# Altium PCB HVBoard_PCB.PcbDoc (part 1 of 2)
Units mm, origin at the board's own origin, x right, y up, seen from the top; angles counter-clockwise.
Board outline 140 x 60 mm, 2 copper layers (Top Layer, Bottom Layer); 89 components, 40 nets, 274 pads, 535 vias.
Unrouted connection lines stored in the file: 6.
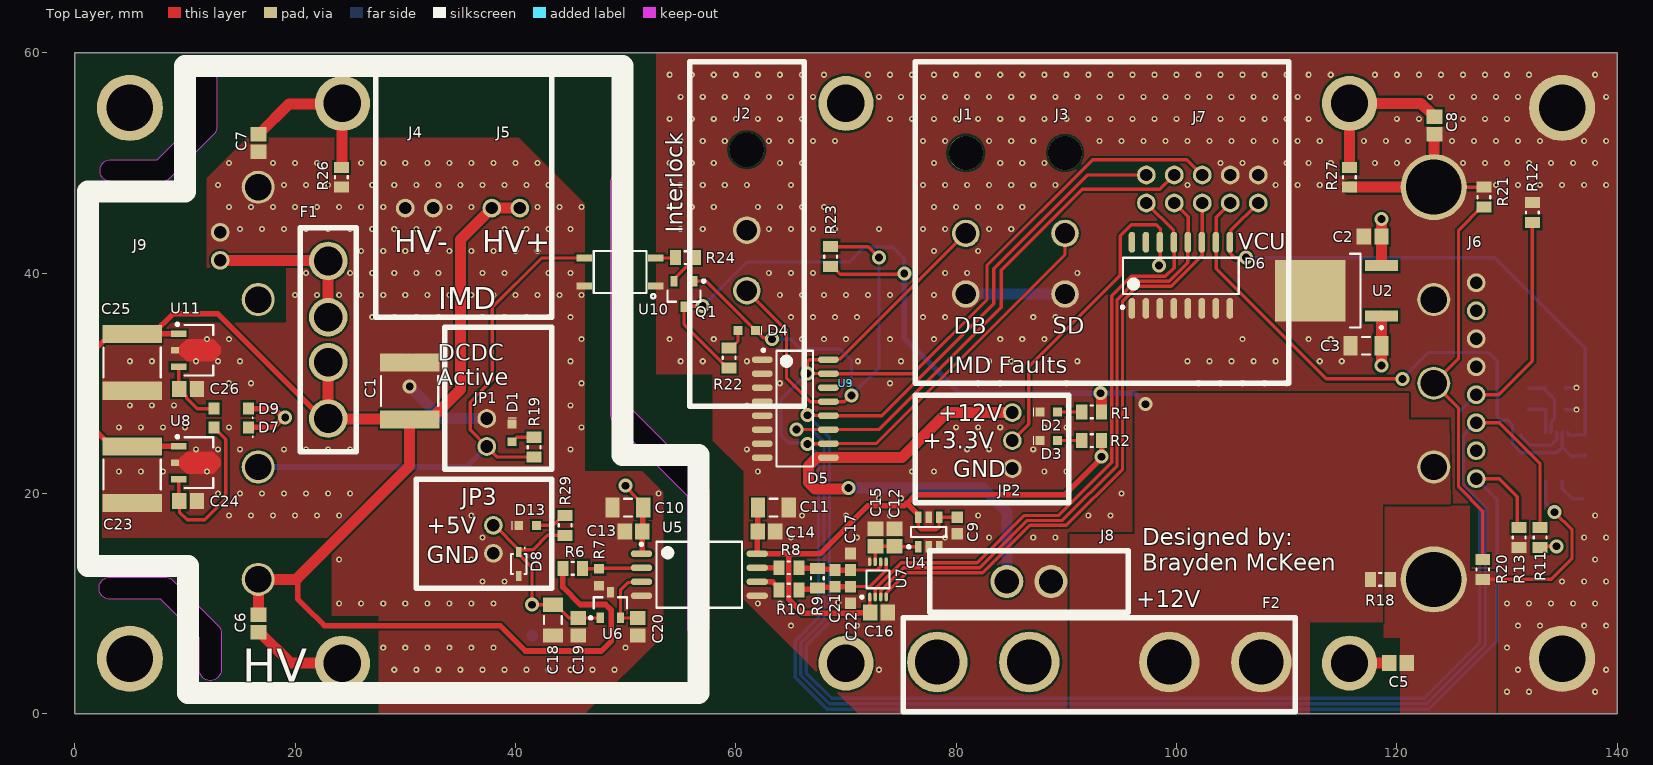
[diagram p0: Top Layer view]
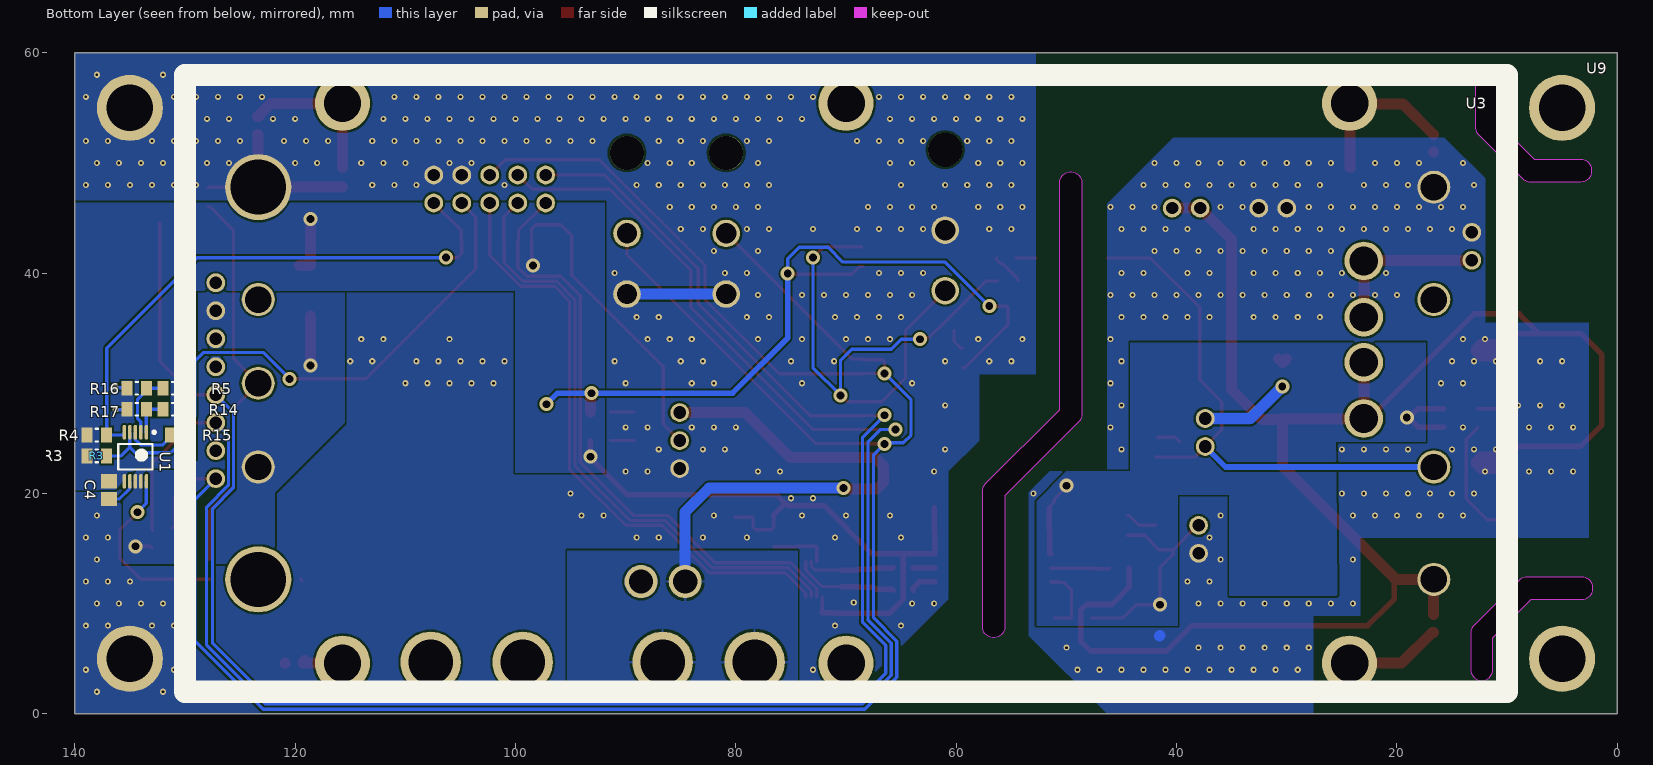
[diagram p1: Bottom Layer view, seen from below]
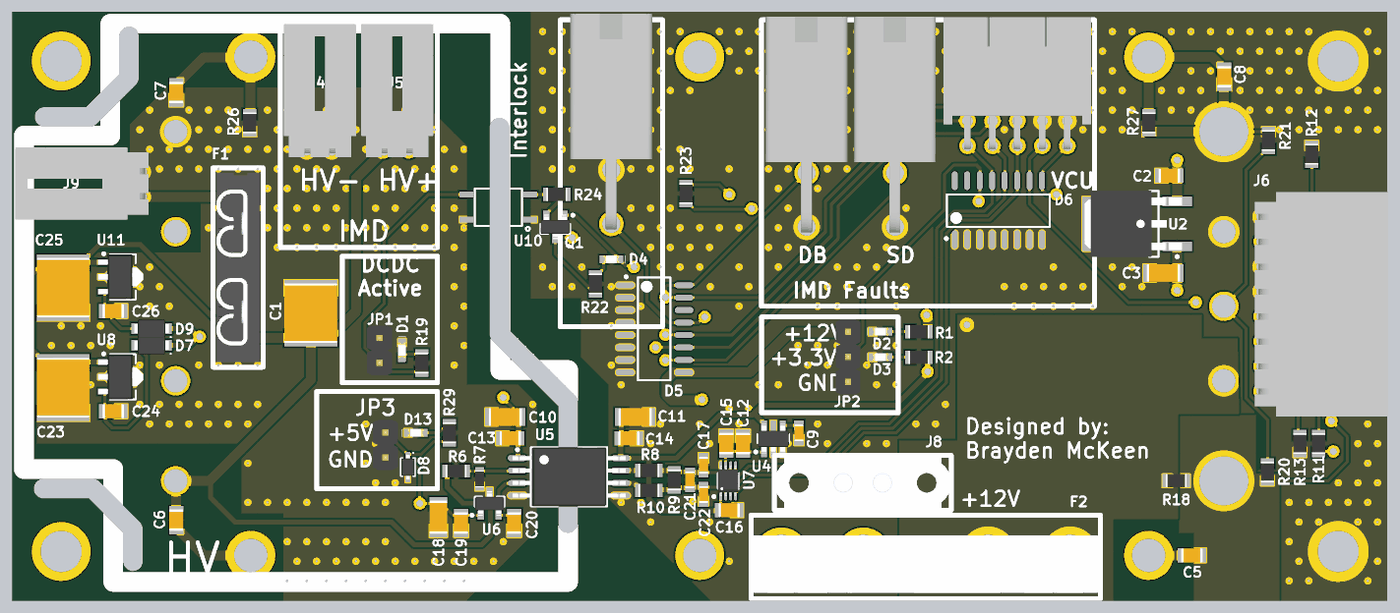
[diagram p2: 3D render of the assembled board from above, using the file's embedded part models]
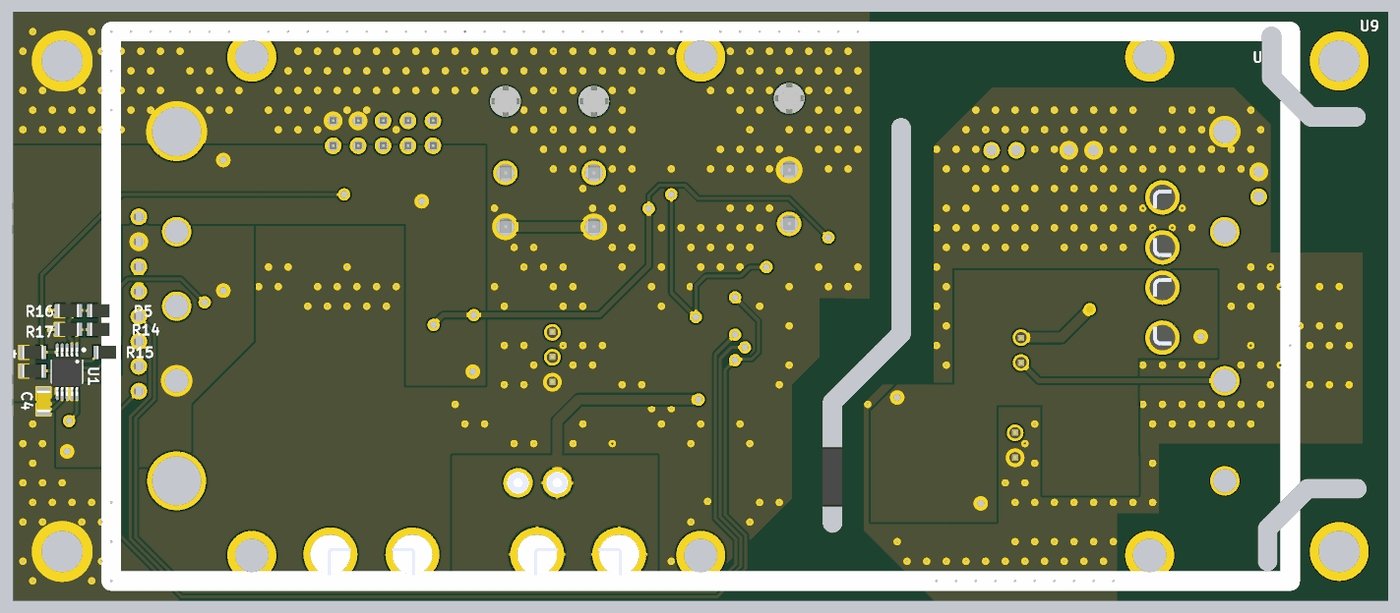
[diagram p3: 3D render of the assembled board from below, using the file's embedded part models]

## Layer stack, top to bottom
Top Solder: solder mask 0.0102, Solder Resist, Dk 3.5
Top Layer: signal copper 0.0356
Dielectric 1: dielectric 0.32, FR-4, Dk 4.8
Bottom Layer: signal copper 0.0356
Bottom Solder: solder mask 0.0102, Solder Resist, Dk 3.5

## Board outline
0,0 0,60 140,60 140,0
cut-out: 3.2,10.4 cw(c3.2,11.4) 3.2,12.4 8.2,12.4 cw(c8.2,11.4) 8.907,12.107 13.007,8.007 cw(c12.3,7.3) 13.3,7.3 13.3,4 cw(c12.3,4) 11.3,4 11.3,6.886 7.786,10.4
cut-out: 3.3,48.3 cw(c3.3,49.3) 3.3,50.3 7.486,50.3 10.9,53.714 10.9,57.5 cw(c11.9,57.5) 12.9,57.5 12.9,53.3 cw(c11.9,53.3) 12.607,52.593 8.607,48.593 cw(c7.9,49.3) 7.9,48.3
cut-out: 48.893,26.493 55.6,19.786 55.6,7.9 ccw(c56.6,7.9) 57.6,7.9 57.6,20.2 ccw(c56.6,20.2) 57.307,20.907 50.6,27.614 50.6,48.2 ccw(c49.6,48.2) 48.6,48.2 48.6,27.2 ccw(c49.6,27.2)

## Design rules (kind name [scope] priority, off if disabled: settings)
Clearance Isolation [InNet('GND-HV') vs InNet('GND-LV')] p1: gap=0.15 ignorepadtopadclearanceinfootprint=FALSE except(6.4: Fill-Fill Fill-Poly Fill-Region Poly-Poly Poly-Region Region-Region)
Clearance Clearance_HV [InNetClass('HV')] p2: gap=0.3 ignorepadtopadclearanceinfootprint=FALSE
Clearance [All] p3: gap=0.15 ignorepadtopadclearanceinfootprint=FALSE except(0.2: Arc-Fill Arc-Poly Arc-Region Track-Fill Track-Poly Track-Region SMDPad-Fill SMDPad-Poly SMDPad-Region THPad-Fill THPad-Poly THPad-Region Via-Fill Via-Poly Via-Region Fill-Fill Fill-Poly Fill-Region Poly-Poly Poly-Region Region-Region)
ComponentClearance [All] p1 off: gap=0.254 collisioncheckmode=3 verticalgap=0 showdistances=FALSE
HoleSize [All] p1: absolutevalues=TRUE maxlimit=100 minlimit=0.025 maxpercent=80.000 minpercent=20.000
MinimumSolderMaskSliver [All] p1: minsoldermaskwidth=0.2
PolygonConnect PolygonConnect_1 [InNet('+12') or InNet('NetC5_2') or InNet('GND-LV') or InNet('GND-HV') or InNet('+3.3-LV') or InNet('+5-HV') or InNet('NetD5_12')] p1: connectstyle=Direct reliefconductorwidth=0.254 reliefentries=4 polygonreliefangle="90 Angle" airgapwidth=0.254
PolygonConnect [All] p2: connectstyle=Relief reliefconductorwidth=0.254 reliefentries=4 polygonreliefangle="90 Angle" airgapwidth=0.254
RoomDefinition HVPowerSupply [InComponentClass('HVPowerSupply')] p1 off: confinementstyle=ConfineIn formatcopy=TRUE lockcomponents=FALSE outline 141.224,28.448 240.157,28.448 240.157,43.434 141.224,43.434
RoomDefinition ConnectorsAndProtection [InComponentClass('ConnectorsAndProtection')] p2 off: confinementstyle=ConfineIn formatcopy=TRUE lockcomponents=FALSE outline 141.097,1.524 231.902,1.524 231.902,27.178 141.097,27.178
RoomDefinition IMD [InComponentClass('IMD')] p3 off: confinementstyle=ConfineIn formatcopy=TRUE lockcomponents=FALSE outline 88.265,1.524 161.163,1.524 161.163,144.653 88.265,144.653
RoomDefinition VoltageMeasurement [InComponentClass('VoltageMeasurement')] p4 off: confinementstyle=ConfineIn formatcopy=TRUE lockcomponents=FALSE outline 0,0 50.8,0 50.8,25.4 0,25.4
RoomDefinition IsoPowerSupply [InComponentClass('IsoPowerSupply')] p5 off: confinementstyle=ConfineIn formatcopy=TRUE lockcomponents=FALSE outline 88.392,1.524 93.345,1.524 93.345,17.145 88.392,17.145
RoutingVias [All] p1: holewidth=0.711 width=1.27 viastyle="Through Hole" minholewidth=0.711 minwidth=1.27 maxholewidth=0.711 maxwidth=1.27
SilkToSolderMaskClearance [IsPad] p1: minsilkscreentomaskgap=0.15 clearancetoexposedcopper=TRUE
SolderMaskExpansion [All] p1: expansion=0.102 istentingtop=FALSE
Width [All] p1: maxlimit=5 minlimit=0.2 preferedwidth=0.2 minimp=50.000000 maximp=50.000000 favimp=50.000000
26 further rules are at their usual default settings.

## Classes and differential pairs
component class HVPowerSupply: C23 C24 C25 C26 D7 D9 D13 R29 U8 U11
component class ConnectorsAndProtection: D4 D5 D6 D8 F1 F2 J1 J2 J3 J7 J8 J9 JP2 JP3 R22 R23 X1 X2
component class IMD: J4 J5 J6 R11 R12 R13 U9
component class VoltageMeasurement: C9 C10 C11 C12 C13 C14 C15 C16 C17 C18 C19 C20 C21 C22 R6 R7 R8 R9 R10 U4 U5 U6 U7
component class IsoPowerSupply: C1 C2 C3 C4 C5 C6 C7 C8 D1 D2 D3 JP1 Q1 R1 R2 R3 R4 R5 R14 R15 R16 R17 R18 R19 R20 R21 R24 R26 R27 U1 U2 U3 u10

## Components (designator, comment, footprint, x,y, rotation, side; value= is the part's Value field where it differs from the comment)
C1 "2.2uF" CAP-2220 30.4,29.3 r270 top
C2 "4.7uF" CAP-0805 117.8,43.3 r0 top
C3 "10uF" CAP-1206 117.2,33.4 r0 top
C4 "0.1uF" CAP-0805 136.9,20.3 r270 bottom
C5 "4.7nF" CAP-0805 120.1,4.6 r0 top
C6 "4.7nF" CAP-0805 16.7,8.2 r90 top
C7 "4.7nF" CAP-0805 16.7,51.8 r270 top
C8 "4.7nF" CAP-0805 123.4,53.4 r270 top
C9 "2.2uF" CAP-0603 80.1,17.1 r90 top
C10 "10uF" CAP-1206 50.212,18.713 r0 top
C11 "10uF" CAP-1206 63.42,18.713 r0 top
C12 "390pF" CAP-0805 74.4,16 r270 top
C13 "0.1uF" CAP-0805 50.72,16.554 r0 top
C14 "0.1uF" CAP-0805 62.785,16.554 r0 top
C15 "1uF" CAP-0805 72.7,16 r90 top
C16 "1uF" CAP-0805 73,9.2 r180 top
C17 "1nF" CAP-0603 70.4,13.8 r90 top
C18 "10uF" CAP-1206 43.4,8.5 r90 top
C19 "0.1uF" CAP-0805 45.7,7.9 r90 top
C20 "0.1uF" CAP-0805 51.1,7.9 r90 top
C21 "2.2nF" CAP-0603 69,12.3 r90 top
C22 "1nF" CAP-0603 70.4,10.8 r90 top
C23 "2.2uF" CAP-2220 5.2,21.7 r90 top
C24 "22uF" CAP-0805 10.3,19.3 r180 top
C25 "2.2uF" CAP-2220 5.2,31.9 r90 top
C26 "22uF" CAP-0805 10.3,29.5 r180 top
D1 "Green" LED-0603 38.9,26.7 r270 top
D2 "Green" LED-0603 87.2,26.6 r0 top
D3 "Green" LED-0603 87.2,24 r0 top
D4 "Green" LED-0603 62.2,35.6 r180 top
D5 "12V" 16-SO 65.4,27.7 r0 top
D6 "3.3V" 16-SO 100.4,39.8 r90 top
D7 "60V" Diode-SOD123W 14.2,26 r180 top
D8 "5V" DIODE-SOD323 40.3,13.6 r270 top
D9 "60V" Diode-SOD123W 14.2,27.7 r180 top
D13 "Green" LED-0603 39.9,16.3 r0 top
F1 "36-3522-2-ND" "Fuse Holder - 500V - 20A" 23,33.95 r270 top
F2 "36-3555-2-ND" "Fuse Holder - 500V - 50A" 93,4.7 r0 top
J1 "0768250002" 2X1PIN 80.88,38.1 r180 top
J2 "0768250002" 2X1PIN 61,38.4 r180 top
J3 "0768250002" 2X1PIN 89.88,38.1 r180 top
J4 "WM4153-ND" 2PIN 32.54,45.9 r180 top
J5 "WM4153-ND" 2PIN 40.4,45.9 r180 top
J6 "23-0705530112-ND" 8PIN 127.2,21.34 r90 top locked
J7 "WM8263-ND" 2X5PIN 107.42,48.9 r180 top
J8 "952-2900-ND" 2Pin-POWER 86.6,12 r0 top
J9 "WM4153-ND" 2PIN 13.2,43.7 r270 top
JP1 "732-5315-ND" 2PIN-JP 37.4,26.8 r270 top
JP2 "732-5316-ND" 3PIN-JP 85.1,27.34 r270 top
JP3 "732-5315-ND" 2PIN-JP 38,14.56 r90 top
Q1 "448-ISS17EP06LMXTSA1CT-ND" SOT-23-3 55.3,38.1 r270 top
R1 "2.2K" RES-0805 92.3,27.4 r0 top
R2 "280R" RES-0805 92.3,24.8 r0 top
R3 "10K" RES-0805 138,23.4 r0 bottom
R4 "10K" RES-0805 138,25.3 r0 bottom
R5 "DNP" RES-0805 131.072,29.55 r180 bottom
R6 "475KR" RES-0805 45.2,13.2 r0 top
R7 "5K" RES-0603 47.6,12.4 r90 top
R8 "30" RES-0805 64.817,13.252 r0 top
R9 "DNP" RES-0805 67.4,12.3 r90 top
R10 "30" RES-0805 64.817,11.22 r0 top
R11 "2.2K" RES-0805 133,16 r270 top
R12 "2.2K" RES-0805 132.3,45.5 r270 top
R13 "2.2K" RES-0805 131.1,16 r90 top
R14 "DNP" RES-0805 131.083,27.645 r180 bottom
R15 "10K" RES-0805 130.4,25.3 r180 bottom
R16 "DNP" RES-0805 134.374,29.55 r180 bottom
R17 "DNP" RES-0805 134.374,27.645 r180 bottom
R18 "738-CSSH0805FTL500CT-ND" RES-0805 118.5,12.2 r180 top
R19 "3.3K" RES-0805 41.7,24.2 r270 top
R20 "DNP" RES-0805 127.8,13.1 r270 top
R21 "DNP" RES-0805 127.9,46.9 r90 top
R22 "2.2K" RES-0805 59.4,32.3 r90 top
R23 "100K" RES-0805 68.6,41.5 r90 top
R24 "1K" RES-0805 55.442,41.4 r0 top
R26 "10M" RES-0805 24.2,48.7 r90 top
R27 "10M" RES-0805 115.7,48.7 r270 top
R29 "665R" RES-0805 44.5,17.1 r270 top
U1 "296-29034-1-ND" 10MSOP 134.501,23.327 r270 bottom
U2 "NCV5501DT33RKGOSCT-ND" DPAK-TO252 114.5,38.4 r180 top
U3 "V150A12C500BL" DCDC-200V-12V-500W 70,30 r0 top locked
U4 "MCP1501T-20E/CHYCT-ND" SOT-23-6 77.5,16.5 r90 top
U5 "296-44577-1-ND" 8-SOICW 56.689,12.617 r0 top
U6 "ISL21010CFH315Z-TKCT-ND" SOT-23-3 48.615,9.875 r90 top
U7 "296-39578-1-ND" 8VSSOP 72.9,12.2 r90 top
U8 "NCP785AH50T1GOSCT-ND" SOT-89 11,22.8 r0 top
U9 "ir155-3402" "IMD-Bender ir155 3204" 70,30 r180 top locked
U10 "TLP184(V4GBTRSE-ND" Photocoupler 49.5,40.1 r180 top
U11 "NCP785AH50T1GOSCT-ND" SOT-89 11,33 r0 top

## Footprints (in the part's own frame and the unit in brackets; to place one, negate y for a bottom-side part, rotate by r counter-clockwise, add the part's x,y. Pads: shape width x height; smd on the part's side, far side on the other; paste and mask are expansions set on the pad)
2PIN [mm]
  round 1.7 hole 1.11: 1(0,0) 2(2.54,0)
  body extent -2.48,-12.89 4.88,0.7, height 7.06
2PIN-JP [mm]
  round 1.7 hole 1.15: 1(0,0) 2(2.54,0)
  body extent -1.24,-1.27 3.84,1.27, height 8.57
2Pin-POWER [mm]
  round 3 hole 2.2: 1(-2,0) 2(2,0)
  silkscreen extent -9,-2.8 9,2.8, body extent -9,-3.27 9,2.78, height 5.6
2X1PIN [mm]
  round 2.5 hole 1.85: 1(0,0) 2(0,-5.5)
  round 3.1 hole 3.1: 3(0,-12.8)
  body extent -4.15,-21.4 4.2,0.56, height 14.55
2X5PIN [mm]
  round 1.7 hole 1.11: 1(0,0) 2(2.54,0) 3(5.08,0) 4(7.62,0) 5(10.16,0) 6(10.16,2.54) 7(7.62,2.54) 8(5.08,2.54) 9(2.54,2.54) 10(0,2.54)
  body extent -2.42,-10.55 12.62,2.85, height 9.87
3PIN-JP [mm]
  round 1.7 hole 1.15: 1(0,0) 2(2.54,0) 3(5.08,0)
  body extent -1.31,-1.27 6.31,1.27, height 8.57
8-SOICW [mm] "SOIC, 8-Leads, Body 5.85x7.50mm, Pitch 1.27mm, IPC Medium Density"
  oval 1.95x0.6 smd: 1(-5.25,1.905) 2(-5.25,0.635) 3(-5.25,-0.635) 4(-5.25,-1.905) 5(5.25,-1.905) 6(5.25,-0.635) 7(5.25,0.635) 8(5.25,1.905)
  silkscreen extent -5.37,-3 3.88,3, body extent -5.75,-3 5.75,3, height 2.8
8PIN [mm]
  round 1.7 hole 1.11: 1(0,0) 2(2.54,0) 3(5.08,0) 4(7.62,0) 5(10.16,0) 6(12.7,0) 7(15.24,0) 8(17.78,0)
  body extent -2.56,-12.89 20.3,0.7, height 7.06
8VSSOP [mm] "TSSOP, 8-Leads, Body 2.00x2.30mm, Pitch 0.50mm, IPC Medium Density"
  oval 0.8x0.3 smd: 1(-1.6,0.75) 2(-1.6,0.25) 3(-1.6,-0.25) 4(-1.6,-0.75) 5(1.6,-0.75) 6(1.6,-0.25) 7(1.6,0.25) 8(1.6,0.75)
  silkscreen extent -1.72,-1.05 0.8,1.57, body extent -1.55,-1.05 1.55,1.05, height 0.9
10MSOP [mm] "TSSOP, 10-Leads, Body 3.00x3.00mm, Pitch 0.50mm, IPC Medium Density"
  oval 1.35x0.3 smd: 1(-2.225,1) 2(-2.225,0.5) 3(-2.225,0) 4(-2.225,-0.5) 5(-2.225,-1) 6(2.225,-1) 7(2.225,-0.5) 8(2.225,0) 9(2.225,0.5) 10(2.225,1)
  silkscreen extent -2.35,-1.55 1.15,1.82, body extent -2.45,-1.55 2.45,1.55, height 1.1
16-SO [mm] "SOIC, 16-Leads, Body 10.2x4.15mm, Pitch 1.27mm, IPC Medium Density"
  oval 1.9x0.6 smd: 1(-3,4.445) 2(-3,3.175) 3(-3,1.905) 4(-3,0.635) 5(-3,-0.635) 6(-3,-1.905) 7(-3,-3.175) 8(-3,-4.445) 9(3,-4.445) 10(3,-3.175) 11(3,-1.905) 12(3,-0.635) 13(3,0.635) 14(3,1.905) 15(3,3.175) 16(3,4.445)
  silkscreen extent -3.02,-5.25 1.6,5.42
CAP-0603 [mm] "Chip Capacitor, 2-Leads, Body 1.60x0.80mm, IPC Medium Density"
  rect 1.05x1 smd: 1(-0.75,0) 2(0.75,0)
  body extent -0.87,-0.48 0.87,0.48, height 0.9
CAP-0805 [mm] "Chip Capacitor, 2-Leads, Body 2.00x1.25mm, IPC Medium Density"
  rect 1.3x1.45 smd: 1(-0.8,0) 2(0.8,0)
  body extent -1.1,-0.72 1.1,0.72, height 1.35
CAP-1206 [mm] "Chip Capacitor, 2-Leads, Body 3.20x1.60mm, IPC Medium Density"
  rect 1.3x1.8 smd: 1(-1.4,0) 2(1.4,0)
  silkscreen extent -0.35,-0.8 0.35,0.8, body extent -1.7,-0.9 1.7,0.9, height 1.7
CAP-2220 [mm] "Chip Capacitor, 2-Leads, Body 5.70x5.00mm, IPC Medium Density"
  rect 1.65x5.4 smd: 1(-2.575,0) 2(2.575,0)
  silkscreen extent -1.35,-2.6 1.35,2.6, body extent -3.05,-2.7 3.05,2.7, height 3.1
DCDC-200V-12V-500W [mm] "Vicor V50A12C500BL"
  round 3 hole 2.4: 1(-53.35,-17.8) 2(-53.35,-7.6) 3(-53.35,7.6) 4(-53.35,17.8) 6(53.35,7.6) 7(53.35,0) 8(53.35,-7.6)
  round 6 hole 5: 5(53.35,17.8) 9(53.35,-17.8)
  round 5 hole 3.4: 10(-45.7,-25.4) 10(-45.7,25.4) 10(0,-25.4) 10(0,25.4) 10(45.7,-25.4) 10(45.7,25.4)
Diode-SOD123W [mm] "SODFL, 2-Leads, Body 1.70x3.50mm, IPC Medium Density"
  rect 1x1.1 smd: 1(-1.55,0) 2(1.55,0)
  silkscreen extent -2,0.8 -1.9,0.9, body extent -1.75,-0.95 1.75,0.95, height 1.1
DIODE-SOD323 [mm] "SODFL, 2-Leads, Body 1.25x2.50mm, IPC Medium Density"
  rect 0.9x0.5 smd: 1(-1.1,0) 2(1.1,0)
  silkscreen extent -1.5,-0.7 0.9,0.7, body extent -1.25,-0.67 1.25,0.67, height 1.1
DPAK-TO252 [mm] "D-PAK, 3-Pads, Body 6.20x6.73mm (max), IPC Medium Density"
  rect 3x1 smd: 1(-4.1,2.29) 3(-4.1,-2.29)
  rect 6.4x5.55 smd: 2(2.35,0)
  silkscreen extent -4.23,-3.35 -1.25,3.46, body extent -4.57,-3.37 5.33,3.37, height 2.38
"Fuse Holder - 500V - 20A" [mm] "Fuse Holder"
  round 3.5 hole 2.6: 1(-7.15,0) 1(-2.05,0) 2(2.05,0) 2(7.15,0)
  silkscreen extent -10.16,-2.54 10.16,2.54, body extent -9.65,-2.22 9.65,2.22, height 7.62
"Fuse Holder - 500V - 50A" [mm] "Fuse Holder"
  round 5.5 hole 4.05: 1(-14.7,0) 1(-6.35,0) 2(6.35,0) 2(14.7,0)
  silkscreen extent -17.78,-4.5 17.78,4, body extent -17.9,-3.92 17.91,1.92, height 11.22
"IMD-Bender ir155 3204" [mm]
  round 6 hole 4.2: 1(-65,-25) 1(-65,25) 1(65,-25) 1(65,25)
LED-0603 [mm]
  rect 0.8x0.8 smd: 1(2,0.8) 2(0.4,0.8)
  silkscreen extent -0.18,0.43 -0.18,1.17, body extent 0.4,0.4 2,1.2, height 0.7
Photocoupler [mm] "Photocoupler"
  rect 1.4x0.6 smd: 1(-3.25,1.27) 3(-3.25,-1.27) 4(3.25,-1.27) 6(3.25,1.27)
  silkscreen extent -3.2,-1.9 2.4,2.4
RES-0603 [mm] "Chip Resistor, 2-Leads, Body 1.60x0.80mm, IPC Medium Density"
  rect 0.85x0.9 smd: 1(-0.775,0) 2(0.775,0)
  body extent -0.85,-0.45 0.85,0.45, height 0.55
RES-0805 [mm] "Chip Resistor, 2-Leads, Body 2.00x1.25mm, IPC Medium Density"
  rect 1x1.35 smd: 1(-0.9,0) 2(0.9,0)
  silkscreen extent -0.1,-0.58 0.1,0.58, body extent -1.05,-0.67 1.05,0.67, height 0.6
SOT-23-3 [mm] "SOT23, 3-Leads, Body 2.90x2.40mm, Pitch 0.92mm, IPC Medium Density"
  rect 0.95x0.65 smd: 1(-1.175,0.915) 2(1.175,0) 3(-1.175,-0.915)
  silkscreen extent -1.3,-1.5 0.7,1.91, body extent -1.25,-1.5 1.25,1.5, height 1.1
SOT-23-6 [mm] "SOT23, 6-Leads, Body 3.00x2.75mm, Pitch 0.95mm, IPC Medium Density"
  rect 1.05x0.6 smd: 1(-1.35,0.95) 2(-1.35,0) 3(-1.35,-0.95) 4(1.35,-0.95) 5(1.35,0) 6(1.35,0.95)
  silkscreen extent -1.47,-1.6 0.45,1.92, body extent -1.5,-1.58 1.5,1.58, height 1.1
SOT-89 [mm] "SOT89, 3-Leads, Body 4.50x2.50mm, Pitch 1.50mm, Lead Span 3.6mm, IPC Medium Density"
  rect 1.4x0.6 smd: 1(-1.55,1.5) 3(-1.55,-1.5)
  rect 0.7x0.6 smd: 2(-1.9,0)
  Top Layer region: -1.55,0.3 -0.85,1 1.55,1 2.25,0.3 2.25,-0.3 1.55,-1 -0.85,-1 -1.55,-0.3
  silkscreen extent -1.8,-2.3 1.57,2.47, body extent -2.2,-2.3 2.36,2.3, height 1.8

## Part data
C1 C23 C25: library part 2220-2.2uF-450V, "CAP CER 2.2UF 450V X6S 2220", Case Code (Imperial)=2220, Case Code (Metric)=5750, Dielectric=X6S, Manufacturer=TDK, Manufacturer Part Number=C5750X6S2W225K250KA, Max Operating Temperature=105°C, Min Operating Temperature=-55°C, Package Quantity=1, Supplier Part Number 1=445-7781-6-ND, Tolerance=10%, Voltage Rating=450V, Capacitance=2.2uF, Case/Package=2220, ComponentLink1Description=http://product.tdk.com/capacitor/mlcc/en/documents/mlcc_commercial_midvoltage_en.pdf?src-supplier=Avnet+Europe, ComponentLink1URL=http://product.tdk.com/capacitor/mlcc/en/documents/mlcc_commercial_midvoltage_en.pdf?src-supplier=Avnet+Europe, Depth=5mm, Height=2.5mm, Lead Free="Lead Free", Length=5.7mm, Mount="Surface Mount", Packaging="Tape and Reel", Pricing 1="1=3.66, 10=2.957, 100=2.258 (USD)", Radiation Hardening=No, REACH SVHC="No SVHC", Stock 1=8149, Supplier 1=Digi-Key, Termination=SMD/SMT, Thickness=0.11inch, Voltage Rating (DC)=450V, Weight=0.016932oz, Width=0.197inch
C2: library part 0805-4.7uF-16V, "CAP CER 4.7UF 16V X5R 0805", Case/Package=0805, Dielectric=X5R, Dielectric Material=Ceramic, Manufacturer=KEMET, Manufacturer Part Number=C0805C475K4PACTU, Max Operating Temperature=85°C, Min Operating Temperature=-55°C, Supplier Part Number 1=399-8101-6-ND, Tolerance=10%, Voltage=16V, Capacitance=4.7uF, ComponentLink1Description=http://capacitoredge.kemet.com/capedge2/DataSheet?pn=C0805C475K4PAC7800&src-supplier=Avnet+Europe, ComponentLink1URL=http://capacitoredge.kemet.com/capedge2/DataSheet?pn=C0805C475K4PAC7800&src-supplier=Avnet+Europe, ComponentLink2Description=https://www.verical.com/server-webapp/html/getDatasheet?partID=319476&src-supplier=Verical, ComponentLink2URL=https://www.verical.com/server-webapp/html/getDatasheet?partID=319476&src-supplier=Verical, Depth=1.25mm, Height=1.25mm, Lead Free="Lead Free", Length=2mm, Mount="Surface Mount", Packaging="Tape and Reel", Pricing 1="1=0.24, 10=0.168, 100=0.0951, 500=0.0671, 1000=0.05872 (USD)", Radiation Hardening=No, Stock 1=96594, Supplier 1=Digi-Key, Termination=SMD/SMT, Voltage Rating (DC)=16V
C3 C10 C11 C18: library part 1206-10uF-50V, "CAP CER 10UF 50V X5R 1206", Case Code (Imperial)=1206, Case Code (Metric)=3216, Manufacturer=Murata, Manufacturer Part Number=GRT31CR61H106ME01L, Max Operating Temperature=85°C, Min Operating Temperature=-55°C, Ratings=AEC-Q200, Supplier Part Number 1=490-12457-1-ND, Tolerance=20%, Voltage Rating=50V, Capacitance=10uF, Case/Package=1206, ComponentLink1Description=http://search.murata.co.jp/Ceramy/image/img/A01X/G101/ENG/GRT31CR61H106ME01-01.pdf?src-supplier=Digi-Key, ComponentLink1URL=http://search.murata.co.jp/Ceramy/image/img/A01X/G101/ENG/GRT31CR61H106ME01-01.pdf?src-supplier=Digi-Key, Length=0.126inch, Mount="Surface Mount", Packaging="Tape and Reel", Pricing 1="1=0.5, 10=0.349, 100=0.2092, 500=0.1569, 1000=0.13249 (USD)", Stock 1=247205, Supplier 1=Digi-Key, Thickness=0.071inch, Width=0.063inch
C4 C13 C14 C19 C20: library part 0805-0.1uF-16V, "CAP CER 0.1UF 16V Y5V 0805", Capacitance=100nF, Case Code (Imperial)=0805, Case Code (Metric)=2012, Dielectric=Y5V, Dielectric Material=Ceramic, Manufacturer=KEMET, Manufacturer Part Number=C0805C104Z4VACTU, Max Operating Temperature=85°C, Min Operating Temperature=-30°C, Package Quantity=1, Supplier Part Number 1=399-9159-6-ND, Tolerance=80%, Voltage Rating=16V, Case/Package=0805, ComponentLink1Description=https://search.kemet.com/component-edge/download/datasheet/C0805C104Z4VACTU.pdf?src-supplier=Digi-Key, ComponentLink1URL=https://search.kemet.com/component-edge/download/datasheet/C0805C104Z4VACTU.pdf?src-supplier=Digi-Key, ComponentLink2Description=https://api.kemet.com/component-edge/download/datasheet/C0805C104Z4VACTU.pdf?src-supplier=Digi-Key, ComponentLink2URL=https://api.kemet.com/component-edge/download/datasheet/C0805C104Z4VACTU.pdf?src-supplier=Digi-Key, ComponentLink3Description=http://www.mouser.com/ds/2/212/KEM_C1005_Y5V_SMD-1101305.pdf?src-supplier=Mouser, ComponentLink3URL=http://www.mouser.com/ds/2/212/KEM_C1005_Y5V_SMD-1101305.pdf?src-supplier=Mouser, ComponentLink4Description=http://components.arrow.com/part/dataview/2091119S8993596N7429?src-supplier=Arrow, ComponentLink4URL=http://components.arrow.com/part/dataview/2091119S8993596N7429?src-supplier=Arrow, Depth=1.25mm, Height=0.78mm, Lead Free="Lead Free", Lead Pitch=0.75mm, Length=2mm, Mount="Surface Mount", Packaging="Tape and Reel", Pricing 1="1=0.11, 10=0.081, 100=0.038, 500=0.02664, 1000=0.02205 (USD)", Stock 1=18565, Supplier 1=Digi-Key, Termination=SMD/SMT, Thickness=0.035inch, Voltage Rating (DC)=16V, Width=0.049inch
C5 C6 C7 C8: library part 0805-4.7nF-250V, "CAP CER 4700PF 250V X7R 0805", Supplier Part Number 1=490-5593-1-ND, Supplier 1=Digi-Key
C9: library part 0603-2.2uF-25V, "CAP CER 2.2UF 25V X5R 0603", Case Code (Imperial)=0603, Case Code (Metric)=1608, Dielectric=X5R, Manufacturer=Murata, Manufacturer Part Number=GRM188R61E225MA12D, Max Operating Temperature=85°C, Min Operating Temperature=-55°C, Package Quantity=4000, Supplier Part Number 1=490-12738-6-ND, Tolerance=20%, Voltage Rating=25V, Capacitance=2.2uF, Case/Package=0603, ComponentLink1Description=http://search.murata.co.jp/Ceramy/image/img/A01X/G101/ENG/GRM188R61E225MA12-01.pdf?src-supplier=Digi-Key, ComponentLink1URL=http://search.murata.co.jp/Ceramy/image/img/A01X/G101/ENG/GRM188R61E225MA12-01.pdf?src-supplier=Digi-Key, ComponentLink2Description=http://www.mouser.com/ds/2/281/c02e-2905.pdf?src-supplier=Mouser, ComponentLink2URL=http://www.mouser.com/ds/2/281/c02e-2905.pdf?src-supplier=Mouser, Composition=Ceramic, Height=0.8mm, Length=0.063inch, Mount="Surface Mount", Packaging="Tape and Reel", Pricing 1="1=0.16, 10=0.115, 100=0.0539, 500=0.03782, 1000=0.0313 (USD)", Stock 1=132633, Supplier 1=Digi-Key, Termination=SMD/SMT, Thickness=0.035inch, Voltage Rating (DC)=25V, Weight=0.000222oz, Width=0.031inch
C12: library part 0805-390pF-50V, "CAP CER 390PF 50V C0G/NP0 0805", Case Code (Imperial)=0805, Case Code (Metric)=2012, Dielectric=C0G, Dielectric Material=Ceramic, Manufacturer=KEMET, Manufacturer Part Number=C0805C391J5GACTU, Max Operating Temperature=125°C, Min Operating Temperature=-55°C, Package Quantity=1, Supplier Part Number 1=399-1132-6-ND, Tolerance=5%, Voltage=50V, Capacitance=390pF, Case/Package=0805, ComponentLink1Description=https://search.kemet.com/component-edge/download/datasheet/C0805C391J5GACTU.pdf?src-supplier=Digi-Key, ComponentLink1URL=https://search.kemet.com/component-edge/download/datasheet/C0805C391J5GACTU.pdf?src-supplier=Digi-Key, ComponentLink2Description=https://www.verical.com/server-webapp/html/getDatasheet?partID=35246&src-supplier=Verical, ComponentLink2URL=https://www.verical.com/server-webapp/html/getDatasheet?partID=35246&src-supplier=Verical, ComponentLink3Description=https://www.alliedelec.com/m/d/9bfe7773041ffe9d406e68bc7b377fdd.pdf?src-supplier=Allied+Electronics, ComponentLink3URL=https://www.alliedelec.com/m/d/9bfe7773041ffe9d406e68bc7b377fdd.pdf?src-supplier=Allied+Electronics, ComponentLink4Description=http://www.farnell.com/datasheets/1372242.pdf?src-supplier=Element14, ComponentLink4URL=http://www.farnell.com/datasheets/1372242.pdf?src-supplier=Element14, ComponentLink5Description=http://www.jameco.com/Jameco/Products/ProdDS/1567367.pdf?src-supplier=Jameco, ComponentLink5URL=http://www.jameco.com/Jameco/Products/ProdDS/1567367.pdf?src-supplier=Jameco, Contact Material=Tin, Contact Plating=Tin,Matte, Depth=1.25mm, Dissipation Factor=0.1%, Height=0.78mm, Lead Free="Lead Free", Lead Pitch=0.75mm, Length=2mm, Mount="Surface Mount,PCB", Packaging="Tape and Reel", Pricing 1="1=0.15, 10=0.105, 100=0.0495, 500=0.03472, 1000=0.02875 (USD)", Radiation Hardening=No, REACH SVHC="No SVHC", Stock 1=12778, Supplier 1=Digi-Key, Termination=SMD/SMT, Thickness=0.035inch, Voltage Rating=50V, Voltage Rating (DC)=50V, Width=0.049inch
C15 C16: library part 0805-1uF-16V, "CAP CER 1UF 16V Y5V 0805", Case Code (Imperial)=0805, Case Code (Metric)=2012, Dielectric=Y5V, Dielectric Material=Ceramic, Manufacturer=KEMET, Manufacturer Part Number=C0805C105Z4VACTU, Max Operating Temperature=85°C, Min Operating Temperature=-30°C, Package Quantity=1, Supplier Part Number 1=399-8011-6-ND, Tolerance=80%, Voltage=16V, Capacitance=1uF, Case/Package=0805, ComponentLink1Description=http://www.farnell.com/datasheets/2739656.pdf?src-supplier=Farnell, ComponentLink1URL=http://www.farnell.com/datasheets/2739656.pdf?src-supplier=Farnell, ComponentLink2Description=http://capacitoredge.kemet.com/capedge2/DataSheet?pn=C0805C105Z4VAC7800&src-supplier=Avnet+Europe, ComponentLink2URL=http://capacitoredge.kemet.com/capedge2/DataSheet?pn=C0805C105Z4VAC7800&src-supplier=Avnet+Europe, ComponentLink3Description=https://www.alliedelec.com/m/d/9bfe7773041ffe9d406e68bc7b377fdd.pdf?src-supplier=Allied+Electronics, ComponentLink3URL=https://www.alliedelec.com/m/d/9bfe7773041ffe9d406e68bc7b377fdd.pdf?src-supplier=Allied+Electronics, ComponentLink4Description=http://www.farnell.com/datasheets/2739656.pdf?src-supplier=Newark, ComponentLink4URL=http://www.farnell.com/datasheets/2739656.pdf?src-supplier=Newark, Contact Material=Tin, Depth=1.25mm, Dissipation Factor=7%, Height=1.25mm, Lead Free="Lead Free", Lead Pitch=0.75mm, Length=2mm, Mount="Surface Mount,PCB", Number of Pins=2, Packaging="Tape and Reel", Pricing 1="1=0.12, 10=0.085, 100=0.0378, 500=0.02702, 1000=0.02124 (USD)", Radiation Hardening=No, REACH SVHC="No SVHC", Stock 1=54729, Supplier 1=Digi-Key, Termination=SMD/SMT, Thickness=0.055inch, Voltage Rating=16V, Voltage Rating (DC)=16V, Width=0.049inch
C17 C22: library part 0603-1nF-50V, "CAP CER 1000PF 50V X7R 0603", Case Code (Imperial)=0603, Case Code (Metric)=1608, Dielectric=X7R, Dielectric Material=Ceramic, Manufacturer=KEMET, Manufacturer Part Number=C0603C102J5RACTU, Max Operating Temperature=125°C, Min Operating Temperature=-55°C, Package Quantity=1, Supplier Part Number 1=399-1083-6-ND, Tolerance=5%, Voltage Rating=50V, Capacitance=1nF, Case/Package=0603, ComponentLink1Description=http://www.onlinecomponents.com/productFiles/mf-KEM/docfinderpartnumberc0402c102k5ractu.pdf?src-supplier=Onlinecomponents.com, ComponentLink1URL=http://www.onlinecomponents.com/productFiles/mf-KEM/docfinderpartnumberc0402c102k5ractu.pdf?src-supplier=Onlinecomponents.com, Depth=0.8mm, Dissipation Factor=2.5%, Height=0.8mm, Lead Pitch=0.7mm, Length=1.6mm, Mount="Surface Mount", Number of Pins=2, Packaging="Tape and Reel", Pricing 1="1=0.1, 10=0.056, 100=0.0248, 500=0.01772, 1000=0.01392 (USD)", Radiation Hardening=No, REACH SVHC="No SVHC", Stock 1=378254, Supplier 1=Digi-Key, Termination=SMD/SMT, Thickness=0.034inch, Voltage Rating (DC)=50V, Width=0.031inch
C21: library part 0603-2.2nF-50V, "CAP CER SMD 0603 2200PF 10% X7R", Case Code (Imperial)=0603, Case Code (Metric)=1608, Dielectric=X7R, Dielectric Material=Ceramic, Manufacturer=KEMET, Manufacturer Part Number=C0603C222K5RAC7411, Max Operating Temperature=125°C, Min Operating Temperature=-55°C, Package Quantity=10000, Supplier Part Number 1=399-17586-6-ND, Tolerance=10%, Voltage Rating=50V, Capacitance=2.2nF, Case/Package=0603, ComponentLink1Description=http://www.mouser.com/ds/2/212/KEM_C1002_X7R_SMD-1102033.pdf?src-supplier=Mouser, ComponentLink1URL=http://www.mouser.com/ds/2/212/KEM_C1002_X7R_SMD-1102033.pdf?src-supplier=Mouser, Depth=0.8mm, Dissipation Factor=2.5%, Height=0.8mm, Lead Pitch=0.7mm, Length=1.6mm, Mount="Surface Mount", Packaging="Tape and Reel", Pricing 1="1=0.1, 10=0.042, 100=0.0186, 500=0.01328, 1000=0.01044, 2500=0.00949, 5000=0.00873 (USD)", Radiation Hardening=No, Stock 1=56383, Supplier 1=Digi-Key, Termination=SMD/SMT, Voltage Rating (DC)=50V, Width=0.8mm
C24 C26: library part 0805-22uF-10V, "CAP CER 22UF 10V X5R 0805", Case Code (Imperial)=0805, Case Code (Metric)=2012, Dielectric=X5R, Dielectric Material=Ceramic, Manufacturer=KEMET, Manufacturer Part Number=C0805C226M8PACTU, Max Operating Temperature=85°C, Min Operating Temperature=-55°C, Supplier Part Number 1=399-12069-6-ND, Tolerance=20%, Voltage=10V, Capacitance=22uF, Case/Package=0805, ComponentLink1Description=http://www.farnell.com/datasheets/2746360.pdf?src-supplier=Newark, ComponentLink1URL=http://www.farnell.com/datasheets/2746360.pdf?src-supplier=Newark, ComponentLink2Description=http://www.farnell.com/datasheets/2746360.pdf?src-supplier=Farnell, ComponentLink2URL=http://www.farnell.com/datasheets/2746360.pdf?src-supplier=Farnell, ComponentLink3Description=http://www.farnell.com/datasheets/2746360.pdf?src-supplier=Element14, ComponentLink3URL=http://www.farnell.com/datasheets/2746360.pdf?src-supplier=Element14, ComponentLink4Description=https://api.kemet.com/component-edge/download/datasheet/C0805C226M8PAC7800.pdf?src-supplier=Digi-Key, ComponentLink4URL=https://api.kemet.com/component-edge/download/datasheet/C0805C226M8PAC7800.pdf?src-supplier=Digi-Key, ComponentLink5Description=http://www.alliedelec.com/m/d/f3c02ddb98afa3dd1adcb801109671e9.pdf?src-supplier=Allied+Electronics, ComponentLink5URL=http://www.alliedelec.com/m/d/f3c02ddb98afa3dd1adcb801109671e9.pdf?src-supplier=Allied+Electronics, Depth=1.25mm, Dissipation Factor=10%, Height=1.25mm, Lead Free="Lead Free", Length=0.079inch, Mount="Surface Mount", Packaging="Tape and Reel", Pricing 1="1=0.47, 10=0.331, 100=0.2179, 500=0.16142, 1000=0.1372 (USD)", Stock 1=29030, Supplier 1=Digi-Key, Termination=Solder, Thickness=0.055inch, Voltage Rating=10V, Voltage Rating (DC)=10V, Width=0.049inch
D1 D2 D3 D4 D13: library part LED-Green, "LED GREEN CLEAR 0603 SMD", Case Code (Imperial)=0603, Case Code (Metric)=1608, Forward Current=30mA, Forward Voltage=2V, Manufacturer="Wurth Electronics", Manufacturer Part Number=150060VS75000, Max Operating Temperature=85°C, Min Operating Temperature=-40°C, Package Quantity=1, Supplier Part Number 1=732-4980-1-ND, Test Current=20mA, Case/Package=0603, Color=Green, ComponentLink1Description=https://katalog.we-online.de/led/datasheet/150060VS75000.pdf?src-supplier=Digi-Key, ComponentLink1URL=https://katalog.we-online.de/led/datasheet/150060VS75000.pdf?src-supplier=Digi-Key, Dominant Wavelength=570nm, Height=0.7mm, Length=1.6mm, Lens Style=Clear,Rectangular, Luminous Intensity=40mcd, Mount="Surface Mount", Number of Pins=2, Packaging="Tape and Reel", Pricing 1="1=0.14, 50=0.133, 100=0.114, 500=0.099 (USD)", REACH SVHC=Unknown, Stock 1=118118, Supplier 1=Digi-Key, Viewing Angle=140°, Wavelength=570nm, Width=0.8mm
D5: library part TVS-12V-X8, "PD 300W VWM 12VCJ 25PFPACKAGE SO", Supplier Part Number 1=1655-2159-1-ND, Supplier 1=Digi-Key
D6: library part TVS-3.3V-X8, "PD 300W VWM 3.3VCJ 25PFPACKAGE S", Supplier Part Number 1=1655-2157-1-ND, Supplier 1=Digi-Key
D7 D9: library part Schottky-60V-2A, "DIODE SCHOTTKY 60V 2A SOD123W", Manufacturer=Nexperia, Manufacturer Part Number=PMEG6020ER,115, Supplier Part Number 1=1727-5217-6-ND, ComponentLink1Description=http://www.farnell.com/datasheets/609333.pdf?src-supplier=Newark, ComponentLink1URL=http://www.farnell.com/datasheets/609333.pdf?src-supplier=Newark, ComponentLink2Description=http://www.farnell.com/datasheets/609333.pdf?src-supplier=Farnell, ComponentLink2URL=http://www.farnell.com/datasheets/609333.pdf?src-supplier=Farnell, ComponentLink3Description=https://assets.nexperia.com/documents/data-sheet/PMEG6020ER.pdf?src-supplier=Digi-Key, ComponentLink3URL=https://assets.nexperia.com/documents/data-sheet/PMEG6020ER.pdf?src-supplier=Digi-Key, Pricing 1="1=0.35, 10=0.287, 25=0.2624, 100=0.1647, 250=0.16288, 500=0.1525, 1000=0.1037 (USD)", Stock 1=416751, Supplier 1=Digi-Key
D8: library part TVS-5V, "TVS DIODE 5V SOD323", Manufacturer=Nexperia, Manufacturer Part Number=PESD5V0U1UA,115, Supplier Part Number 1=1727-4155-6-ND, ComponentLink1Description=https://assets.nexperia.com/documents/data-sheet/PESD5V0U1UA_UB_UL.pdf?src-supplier=Digi-Key, ComponentLink1URL=https://assets.nexperia.com/documents/data-sheet/PESD5V0U1UA_UB_UL.pdf?src-supplier=Digi-Key, ComponentLink2Description=http://www.farnell.com/datasheets/453996.pdf?src-supplier=Farnell, ComponentLink2URL=http://www.farnell.com/datasheets/453996.pdf?src-supplier=Farnell, Pricing 1="1=0.43, 10=0.32, 25=0.28, 100=0.152, 250=0.1512, 500=0.124, 1000=0.092 (USD)", Stock 1=127058, Supplier 1=Digi-Key
F1: library part "Fuse Holder - 500V - 20A", "FUSE CLIP BLADE 500V 20A PCB", Supplier 1=Digi-Key
F2: library part "Fuse Holder - 500V - 50A", "FUSE BLOCK BLADE 500V 50A PCB", Supplier 1=Digi-Key
J1 J2 J3: library part 2X1PIN, "CONN HEADER R/A 2POS", Color=Black, Manufacturer=Molex, Manufacturer Part Number=76825-0002, Supplier Part Number 1=WM11969-ND, ComponentLink1Description=http://www.farnell.com/datasheets/1968956.pdf?src-supplier=Element14, ComponentLink1URL=http://www.farnell.com/datasheets/1968956.pdf?src-supplier=Element14, ComponentLink2Description=http://www.farnell.com/datasheets/2216551.pdf?src-supplier=Newark, ComponentLink2URL=http://www.farnell.com/datasheets/2216551.pdf?src-supplier=Newark, ComponentLink3Description=http://www.farnell.com/datasheets/2216551.pdf?src-supplier=Farnell, ComponentLink3URL=http://www.farnell.com/datasheets/2216551.pdf?src-supplier=Farnell, ComponentLink4Description=https://www.molex.com/pdm_docs/sd/768250002_sd.pdf?src-supplier=Digi-Key, ComponentLink4URL=https://www.molex.com/pdm_docs/sd/768250002_sd.pdf?src-supplier=Digi-Key, ComponentLink5Description=http://www.farnell.com/datasheets/2001779.pdf?src-supplier=Element14, ComponentLink5URL=http://www.farnell.com/datasheets/2001779.pdf?src-supplier=Element14, ComponentLink6Description=http://www.alliedelec.com/images/products/datasheets/bm/BrandonData/70717238.pdf?src-supplier=Allied+Electronics, ComponentLink6URL=http://www.alliedelec.com/images/products/datasheets/bm/BrandonData/70717238.pdf?src-supplier=Allied+Electronics, Contact Material=Copper, Contact Plating=Tin, Gender=Male, Number of Circuits=2, Number of Contacts=2, Number of Rows=2, Orientation="Right Angle", Pitch=5.7mm, Pricing 1="1=1.13, 10=0.993, 25=0.9344, 50=0.8956, 100=0.8567, 250=0.7788, 500=0.70092, 1000=0.62304, 2500=0.56463 (USD)", REACH SVHC=Unknown, Stock 1=0, Supplier 1=Digi-Key, Termination="Through Hole"
J4 J5 J9: library part 2PIN, "CONN HEADER R/A 2POS 2.54MM", Color=Black, Contact Resistance=30mR, Manufacturer=Molex, Manufacturer Part Number=0705530106, Max Operating Temperature=105°C, Min Operating Temperature=-40°C, ComponentLink1Description=http://www.molex.com/webdocs/datasheets/pdf/en-us/0705530106_PCB_HEADERS.pdf?src-supplier=Avnet+Asia, ComponentLink1URL=http://www.molex.com/webdocs/datasheets/pdf/en-us/0705530106_PCB_HEADERS.pdf?src-supplier=Avnet+Asia, ComponentLink2Description=https://www.molex.com/pdm_docs/ps/PS-70400.pdf?src-supplier=Digi-Key, ComponentLink2URL=https://www.molex.com/pdm_docs/ps/PS-70400.pdf?src-supplier=Digi-Key, Connector Type="Male Pin", Contact Material=Bronze, Contact Mating Length=0.24inch, Contact Plating=Gold, Depth=13.59mm, Housing Color=Black, Housing Material=Polyester, Length=7.37mm, Mount="Through Hole", Number of Contacts=2, Number of Positions=2, Number of Rows=1, Orientation="Right Angle", Packaging=Rail/Tube, Pitch=2.54mm, Pricing 1="1=1.38, 10=1.25, 100=1.071, 500=0.8925, 1000=0.765, 5000=0.6783, 10000=0.663 (USD)", Stock 1=2224, Supplier 1=Digi-Key, Supplier Part Number 1=WM4153-ND, Termination=Solder
J6: library part 8PIN, "CONN HEADER R/A 8POS 2.54MM", Color=Black, Contact Resistance=30mR, Current Rating=3A, Flammability Rating="UL94 V-0", Insulation Resistance=1GR, Manufacturer=Molex, Manufacturer Part Number=70553-0112, Max Operating Temperature=105°C, Min Operating Temperature=-40°C, Package Quantity=1, Voltage Rating=250V, ComponentLink1Description=https://www.molex.com/pdm_docs/ps/PS-70400.pdf?src-supplier=Digi-Key, ComponentLink1URL=https://www.molex.com/pdm_docs/ps/PS-70400.pdf?src-supplier=Digi-Key, ComponentLink2Description=http://www.mouser.com/ds/2/276/0705530112_PCB_HEADERS-172840.pdf?src-supplier=Mouser, ComponentLink2URL=http://www.mouser.com/ds/2/276/0705530112_PCB_HEADERS-172840.pdf?src-supplier=Mouser, Connector Type="Male Pin", Contact Material=Bronze, Contact Mating Length=0.24inch, Contact Plating=Gold, ELV=Compliant, Glow Wire Compliant=Non-compliant, Housing Material=Thermoplastic, Material=Brass, Mount="Through Hole", Number of Circuits=8, Number of Contacts=8, Number of Positions=8, Number of Rows=1, Orientation="Right Angle", Packaging=Rail/Tube, Pitch=2.54mm, Pricing 1="1=2.43, 10=2.205, 100=1.89, 500=1.575, 1000=1.35, 5000=1.197, 10000=1.17 (USD)", Stock 1=1363, Supplier 1=Digi-Key, Supplier Part Number 1=23-0705530112-ND, Termination=Solder, Voltage Rating (DC)=250V
J7: library part 2X5PIN, "CONN HEADER R/A 10POS 2.54MM", Color=Black, Current Rating=3A, Flammability Rating="UL94 V-0", Manufacturer=Molex, Manufacturer Part Number=90130-3110, Max Operating Temperature=125°C, Max Voltage Rating (AC)=350V, Max Voltage Rating (DC)=350.35kV, Min Operating Temperature=-55°C, Package Quantity=1, ComponentLink1Description=http://www.mouser.com/ds/2/276/0901303110_PCB_HEADERS-151522.pdf?src-supplier=Mouser, ComponentLink1URL=http://www.mouser.com/ds/2/276/0901303110_PCB_HEADERS-151522.pdf?src-supplier=Mouser, ComponentLink2Description=http://uk.rs-online.com/webdocs/13c4/0900766b813c4c8e.pdf?src-supplier=RSComponents, ComponentLink2URL=http://uk.rs-online.com/webdocs/13c4/0900766b813c4c8e.pdf?src-supplier=RSComponents, ComponentLink3Description=http://www.molex.com/webdocs/datasheets/pdf/en-us/0901303110_PCB_HEADERS.pdf?src-supplier=Avnet, ComponentLink3URL=http://www.molex.com/webdocs/datasheets/pdf/en-us/0901303110_PCB_HEADERS.pdf?src-supplier=Avnet, ComponentLink4Description=http://www.molex.com/pdm_docs/sd/901303110_sd.pdf?src-supplier=Digi-Key, ComponentLink4URL=http://www.molex.com/pdm_docs/sd/901303110_sd.pdf?src-supplier=Digi-Key, ComponentLink5Description=http://www.molex.com/webdocs/datasheets/pdf/en-us/0901303110_PCB_HEADERS.pdf?src-supplier=Avnet+Europe, ComponentLink5URL=http://www.molex.com/webdocs/datasheets/pdf/en-us/0901303110_PCB_HEADERS.pdf?src-supplier=Avnet+Europe, Connector Type="Male Pin", Contact Material=Brass, Contact Mating Length=0.266inch, Contact Plating=Tin,Lead, Depth=9.75mm, Gender=Male, Glow Wire Compliant=Non-compliant, Housing Color=Black, Housing Material=Polyester, Lead Free="Lead Free", Length=15.42mm, Mount="Through Hole", Number of Circuits=10, Number of Contacts=10, Number of Positions=10, Number of Rows=2, Orientation="Right Angle", Packaging=Tray, Pitch=2.54mm, Pricing 1="1=1.47, 10=1.329, 100=1.1395, 500=0.94956, 1000=0.8139, 5000=0.72166, 10000=0.70538 (USD)", Radiation Hardening=No, REACH SVHC="No SVHC", Row Spacing=0.1inch, Stock 1=3596, Supplier 1=Digi-Key, Supplier Part Number 1=WM8263-ND, Termination=Solder, Voltage Rating=350V, Voltage Rating (DC)=350V
J8: library part 2PIN-POWER, "CONN HEADER VERT 2POS 4MM 800V 40A", Supplier 1=Digi-Key, Supplier Part Number 1=952-2900-ND
JP1 JP3: library part 2PIN-TEST, "CONN HEADER VERT 2POS 2.54MM"
JP2: library part 3PIN-TEST, "CONN HEADER VERT 3POS 2.54MM"
Q1: library part P-FET-60V-0.3A, "MOSFET P-CH 60V 300MA SOT23-3", Case/Package=SOT-23-3, Manufacturer="ON Semiconductor", Manufacturer Part Number=ISS17EP06LMXTSA1, Max Operating Temperature=150°C, Min Operating Temperature=-55°C, On-State Resistance=1.7R, ComponentLink1Description=http://www.onsemi.com/pub/Collateral/BSS138LT1-D.PDF?src-supplier=Digi-Key, ComponentLink1URL=http://www.onsemi.com/pub/Collateral/BSS138LT1-D.PDF?src-supplier=Digi-Key, ComponentLink2Description=http://www.farnell.com/datasheets/2353875.pdf?src-supplier=Element14, ComponentLink2URL=http://www.farnell.com/datasheets/2353875.pdf?src-supplier=Element14, ComponentLink3Description=http://www.onsemi.com/pub_link/Collateral/BSS138LT1-D.PDF?src-supplier=Avnet, ComponentLink3URL=http://www.onsemi.com/pub_link/Collateral/BSS138LT1-D.PDF?src-supplier=Avnet, ComponentLink4Description=https://www.verical.com/server-webapp/html/getDatasheet?partID=141721&src-supplier=Verical, ComponentLink4URL=https://www.verical.com/server-webapp/html/getDatasheet?partID=141721&src-supplier=Verical, ComponentLink5Description=http://www.onsemi.com/pub_link/Collateral/BSS138LT1-D.PDF?src-supplier=Future+Electronics, ComponentLink5URL=http://www.onsemi.com/pub_link/Collateral/BSS138LT1-D.PDF?src-supplier=Future+Electronics, Number of Pins=3, Pricing 1="1=0.25, 10=0.205, 25=0.172, 100=0.084, 250=0.08272, 500=0.0701, 1000=0.04871, 2500=0.04527, 5000=0.03916 (USD)", Stock 1=141691, Supplier 1=Digi-Key, Supplier Part Number 1=448-ISS17EP06LMXTSA1CT-ND
R1 R11 R12 R13 R22: library part 0805-2.2KR, "RES SMD 2.2K OHM 1% 1/8W 0805", Case Code (Imperial)=0805, Case Code (Metric)=2012, Manufacturer=Yageo, Manufacturer Part Number=RC0805FR-072K2L, Max Operating Temperature=155°C, Max Power Dissipation=125mW, Min Operating Temperature=-55°C, Package Quantity=1, Resistance=2.2kR, Supplier Part Number 1=311-2.20KCRDKR-ND, Temperature Coefficient=100ppm/°C, Tolerance=1%, Voltage Rating=150V, Case/Package=0805, ComponentLink1Description=http://www.farnell.com/datasheets/38627.pdf?src-supplier=Element14, ComponentLink1URL=http://www.farnell.com/datasheets/38627.pdf?src-supplier=Element14, ComponentLink2Description=http://www.farnell.com/datasheets/444164.pdf?src-supplier=Element14, ComponentLink2URL=http://www.farnell.com/datasheets/444164.pdf?src-supplier=Element14, ComponentLink3Description=http://www.yageo.com/documents/recent/PYu-RC_Group_51_RoHS_L_9.pdf?src-supplier=Digi-Key, ComponentLink3URL=http://www.yageo.com/documents/recent/PYu-RC_Group_51_RoHS_L_9.pdf?src-supplier=Digi-Key, ComponentLink4Description=http://www.yageo.com/documents/recent/PYu-RC_Group_51_RoHS_L_10.pdf?src-supplier=Digi-Key, ComponentLink4URL=http://www.yageo.com/documents/recent/PYu-RC_Group_51_RoHS_L_10.pdf?src-supplier=Digi-Key, Composition="Thick Film", Depth=1.25mm, Features="Moisture Resistant", Height=0.5mm, Lead Free="Lead Free", Lead Pitch=0.4mm, Length=2mm, Military Standard=Not, Number of Pins=2, Number of Terminations=2, Packaging="Tape and Reel", Power Rating=125mW, Pricing 1="1=0.1, 10=0.04, 100=0.0163, 1000=0.00731, 2500=0.00635 (USD)", REACH SVHC=Unknown, Stock 1=4156138, Supplier 1=Digi-Key, Termination=SMD/SMT, Voltage Rating (DC)=150V, Width=1.25mm
R2: library part 0805-280R, "RES SMD 280 OHM 1% 1/8W 0805", Case Code (Imperial)=0805, Case Code (Metric)=2012, Manufacturer=Yageo, Manufacturer Part Number=RC0805FR-07280RL, Max Operating Temperature=155°C, Max Power Dissipation=125mW, Min Operating Temperature=-55°C, Package Quantity=1, Supplier Part Number 1=311-280CRDKR-ND, Temperature Coefficient=100ppm/°C, Tolerance=1%, Voltage Rating=150V, Case/Package=0805, ComponentLink1Description=http://www.yageo.ru/pdf/RC0805.pdf?src-supplier=Mouser, ComponentLink1URL=http://www.yageo.ru/pdf/RC0805.pdf?src-supplier=Mouser, ComponentLink2Description=http://www.yageo.ru/pdf/RC0805.pdf?src-supplier=Future+Electronics, ComponentLink2URL=http://www.yageo.ru/pdf/RC0805.pdf?src-supplier=Future+Electronics, ComponentLink3Description=http://www.yageo.com.tw/exep/pages/download/literatures/PYu-R_INT-thick_7.pdf?src-supplier=Digi-Key, ComponentLink3URL=http://www.yageo.com.tw/exep/pages/download/literatures/PYu-R_INT-thick_7.pdf?src-supplier=Digi-Key, ComponentLink4Description=http://www.yageo.com/documents/recent/PYu-RC_Group_51_RoHS_L_9.pdf?src-supplier=Digi-Key, ComponentLink4URL=http://www.yageo.com/documents/recent/PYu-RC_Group_51_RoHS_L_9.pdf?src-supplier=Digi-Key, Composition="Thick Film", Depth=1.25mm, Features="Moisture Resistant", Height=0.024inch, Lead Free="Lead Free", Length=2mm, Military Standard=Not, Number of Terminations=2, Packaging="Tape and Reel", Power Rating=125mW, Pricing 1="1=0.1, 10=0.04, 100=0.0163, 1000=0.00731, 2500=0.00635 (USD)", Resistance=280R, Stock 1=43663, Supplier 1=Digi-Key, Termination=SMD/SMT, Voltage Rating (DC)=150V, Width=1.25mm
R3 R4 R15: library part 0805-10KR, "RES SMD 10K OHM 1% 1/8W 0805", Case Code (Imperial)=0805, Case Code (Metric)=2012, Manufacturer=Yageo, Manufacturer Part Number=RC0805FR-0710KL, Max Operating Temperature=155°C, Max Power Dissipation=125mW, Min Operating Temperature=-55°C, Package Quantity=1, Resistance=10kR, Supplier Part Number 1=311-10.0KCRCT-ND, Temperature Coefficient=100ppm/°C, Tolerance=1%, Voltage Rating=150V, Case/Package=0805, ComponentLink1Description=http://www.yageo.com/documents/recent/PYu-RC_Group_51_RoHS_L_9.pdf?src-supplier=Mouser, ComponentLink1URL=http://www.yageo.com/documents/recent/PYu-RC_Group_51_RoHS_L_9.pdf?src-supplier=Mouser, ComponentLink2Description=http://www.farnell.com/datasheets/2167052.pdf?src-supplier=Element14, ComponentLink2URL=http://www.farnell.com/datasheets/2167052.pdf?src-supplier=Element14, ComponentLink3Description=http://www.yageo.com/documents/recent/PYu-RC_Group_51_RoHS_L_10.pdf?src-supplier=Digi-Key, ComponentLink3URL=http://www.yageo.com/documents/recent/PYu-RC_Group_51_RoHS_L_10.pdf?src-supplier=Digi-Key, ComponentLink4Description=http://www.yageo.ru/pdf/RC0805.pdf?src-supplier=Future+Electronics, ComponentLink4URL=http://www.yageo.ru/pdf/RC0805.pdf?src-supplier=Future+Electronics, Composition="Thick Film", Depth=1.25mm, Features="Moisture Resistant", Height=0.024inch, Lead Free="Lead Free", Length=2mm, Military Standard=Not, Number of Terminations=2, Packaging="Tape and Reel", Power Rating=125mW, Pricing 1="1=0.1, 10=0.04, 100=0.0163, 1000=0.00731, 2500=0.00635 (USD)", REACH SVHC=Unknown, Stock 1=26112993, Supplier 1=Digi-Key, Termination=SMD/SMT, Width=0.049inch
R6: library part 0805-475KR, "RES 475K OHM 0.1% 1/8W 0805", Supplier Part Number 1=P475KDACT-ND, Supplier 1=Digi-Key
R7: library part 0603-5KR, "RES SMD 4.99K OHM 1% 1/10W 0603", Case Code (Imperial)=0603, Case Code (Metric)=1608, Manufacturer=Bourns, Manufacturer Part Number=CR0603-FX-4991ELF, Max Operating Temperature=155°C, Max Power Dissipation=100mW, Min Operating Temperature=-55°C, Package Quantity=1, Resistance=4.99kR, Supplier Part Number 1=CR0603-FX-4991ELFDKR-ND, Temperature Coefficient=100ppm/°C, Tolerance=1%, Voltage Rating=50V, Case/Package=0603, ComponentLink1Description=https://www.bourns.com/docs/Product-Datasheets/CHPREZTR.pdf?src-supplier=Digi-Key, ComponentLink1URL=https://www.bourns.com/docs/Product-Datasheets/CHPREZTR.pdf?src-supplier=Digi-Key, ComponentLink2Description=http://www.bourns.com/pdfs/chpreztr.pdf?src-supplier=Avnet, ComponentLink2URL=http://www.bourns.com/pdfs/chpreztr.pdf?src-supplier=Avnet, Composition="Thick Film", Contact Plating=Tin, Features="Moisture Resistant", Height=0.022inch, Length=0.063inch, Mount="Surface Mount", Number of Terminations=2, Packaging="Tape and Reel", Power Rating=100mW, Pricing 1="1=0.1, 10=0.02, 25=0.0144, 50=0.011, 100=0.0082, 250=0.00624, 500=0.00498, 1000=0.00367 (USD)", Radiation Hardening=No, Stock 1=70557, Supplier 1=Digi-Key, Termination=SMD/SMT, Thickness=457um, Width=0.8mm
R8 R10: library part 0805-30R, "RES SMD 30 OHM 1% 1/8W 0805", Supplier Part Number 1=P30.0CCT-ND, Supplier 1=Digi-Key
R18: library part 0805-0.0005R, "RES SHUNT, 0805, 0.0005 OHM, 1%,", Supplier 1=Digi-Key, Supplier Part Number 1=738-CSSH0805FTL500CT-ND
R19: library part 0805-3.3KR, "RES SMD 3.3K OHM 1% 1/8W 0805", Manufacturer="TE Connectivity", Manufacturer Part Number=CRGCQ0805F3K3, Supplier Part Number 1=A129755DKR-ND, ComponentLink1Description=https://4donline.ihs.com/images/VipMasterIC/IC/TYEL/TYEL-S-A0004929575/TYEL-S-A0004929575-1.pdf?hkey=52A5661711E402568146F3353EA87419&src-supplier=Farnell, ComponentLink1URL=https://4donline.ihs.com/images/VipMasterIC/IC/TYEL/TYEL-S-A0004929575/TYEL-S-A0004929575-1.pdf?hkey=52A5661711E402568146F3353EA87419&src-supplier=Farnell, Pricing 1="1=0.1, 10=0.048, 100=0.0196, 1000=0.00882, 2500=0.00766 (USD)", Stock 1=41625, Supplier 1=Digi-Key
R23: library part 0805-100KR, "RES SMD 100K OHM 1% 1/8W 0805", Case Code (Imperial)=0805, Case Code (Metric)=2012, Manufacturer=Yageo, Manufacturer Part Number=RC0805FR-07100KL, Max Operating Temperature=155°C, Max Power Dissipation=125mW, Min Operating Temperature=-55°C, Package Quantity=1, Resistance=100kR, Supplier Part Number 1=311-100KCRDKR-ND, Temperature Coefficient=100ppm/°C, Tolerance=1%, Voltage Rating=150V, Case/Package=0805, ComponentLink1Description=http://www.yageo.com/documents/recent/PYu-RC_Group_51_RoHS_L_10.pdf?src-supplier=Digi-Key, ComponentLink1URL=http://www.yageo.com/documents/recent/PYu-RC_Group_51_RoHS_L_10.pdf?src-supplier=Digi-Key, ComponentLink2Description=http://www.yageo.com/documents/recent/PYu-RC_Group_51_RoHS_L_9.pdf?src-supplier=Mouser, ComponentLink2URL=http://www.yageo.com/documents/recent/PYu-RC_Group_51_RoHS_L_9.pdf?src-supplier=Mouser, ComponentLink3Description=http://documents.rs-components.com/techlib://itc_doclist_GB.htm?stockno=6185113&src-supplier=RSComponents, ComponentLink3URL=http://documents.rs-components.com/techlib://itc_doclist_GB.htm?stockno=6185113&src-supplier=RSComponents, ComponentLink4Description=http://www.yageo.ru/pdf/RC0805.pdf?src-supplier=Future+Electronics, ComponentLink4URL=http://www.yageo.ru/pdf/RC0805.pdf?src-supplier=Future+Electronics, ComponentLink5Description=http://www.farnell.com/datasheets/38627.pdf?src-supplier=Element14, ComponentLink5URL=http://www.farnell.com/datasheets/38627.pdf?src-supplier=Element14, ComponentLink6Description=http://www.farnell.com/datasheets/2167052.pdf?src-supplier=Element14, ComponentLink6URL=http://www.farnell.com/datasheets/2167052.pdf?src-supplier=Element14, ComponentLink7Description=http://www.farnell.com/datasheets/1686128.pdf?src-supplier=Element14, ComponentLink7URL=http://www.farnell.com/datasheets/1686128.pdf?src-supplier=Element14, ComponentLink8Description=http://www.farnell.com/datasheets/444164.pdf?src-supplier=Element14, ComponentLink8URL=http://www.farnell.com/datasheets/444164.pdf?src-supplier=Element14, Composition="Thick Film", Depth=1.25mm, Features="Moisture Resistant", Height=0.024inch, Lead Free="Lead Free", Lead Pitch=0.4mm, Length=2mm, Military Standard=Not, Number of Pins=2, Number of Terminations=2, Packaging="Tape and Reel", Power Rating=125mW, Pricing 1="1=0.1, 10=0.04, 100=0.0163, 1000=0.00731, 2500=0.00635 (USD)", REACH SVHC=Unknown, Stock 1=5636840, Supplier 1=Digi-Key, Termination=SMD/SMT, Voltage Rating (DC)=150V, Width=0.049inch